# Altium PCB CLARA Mainboard.PcbDoc
Units mm, origin at the board's own origin, x right, y up, seen from the top; angles counter-clockwise.
Board outline 44.16 x 42.91 mm, 2 copper layers (Top Layer, Bottom Layer); 16 components, 5 nets, 98 pads, 16 vias.
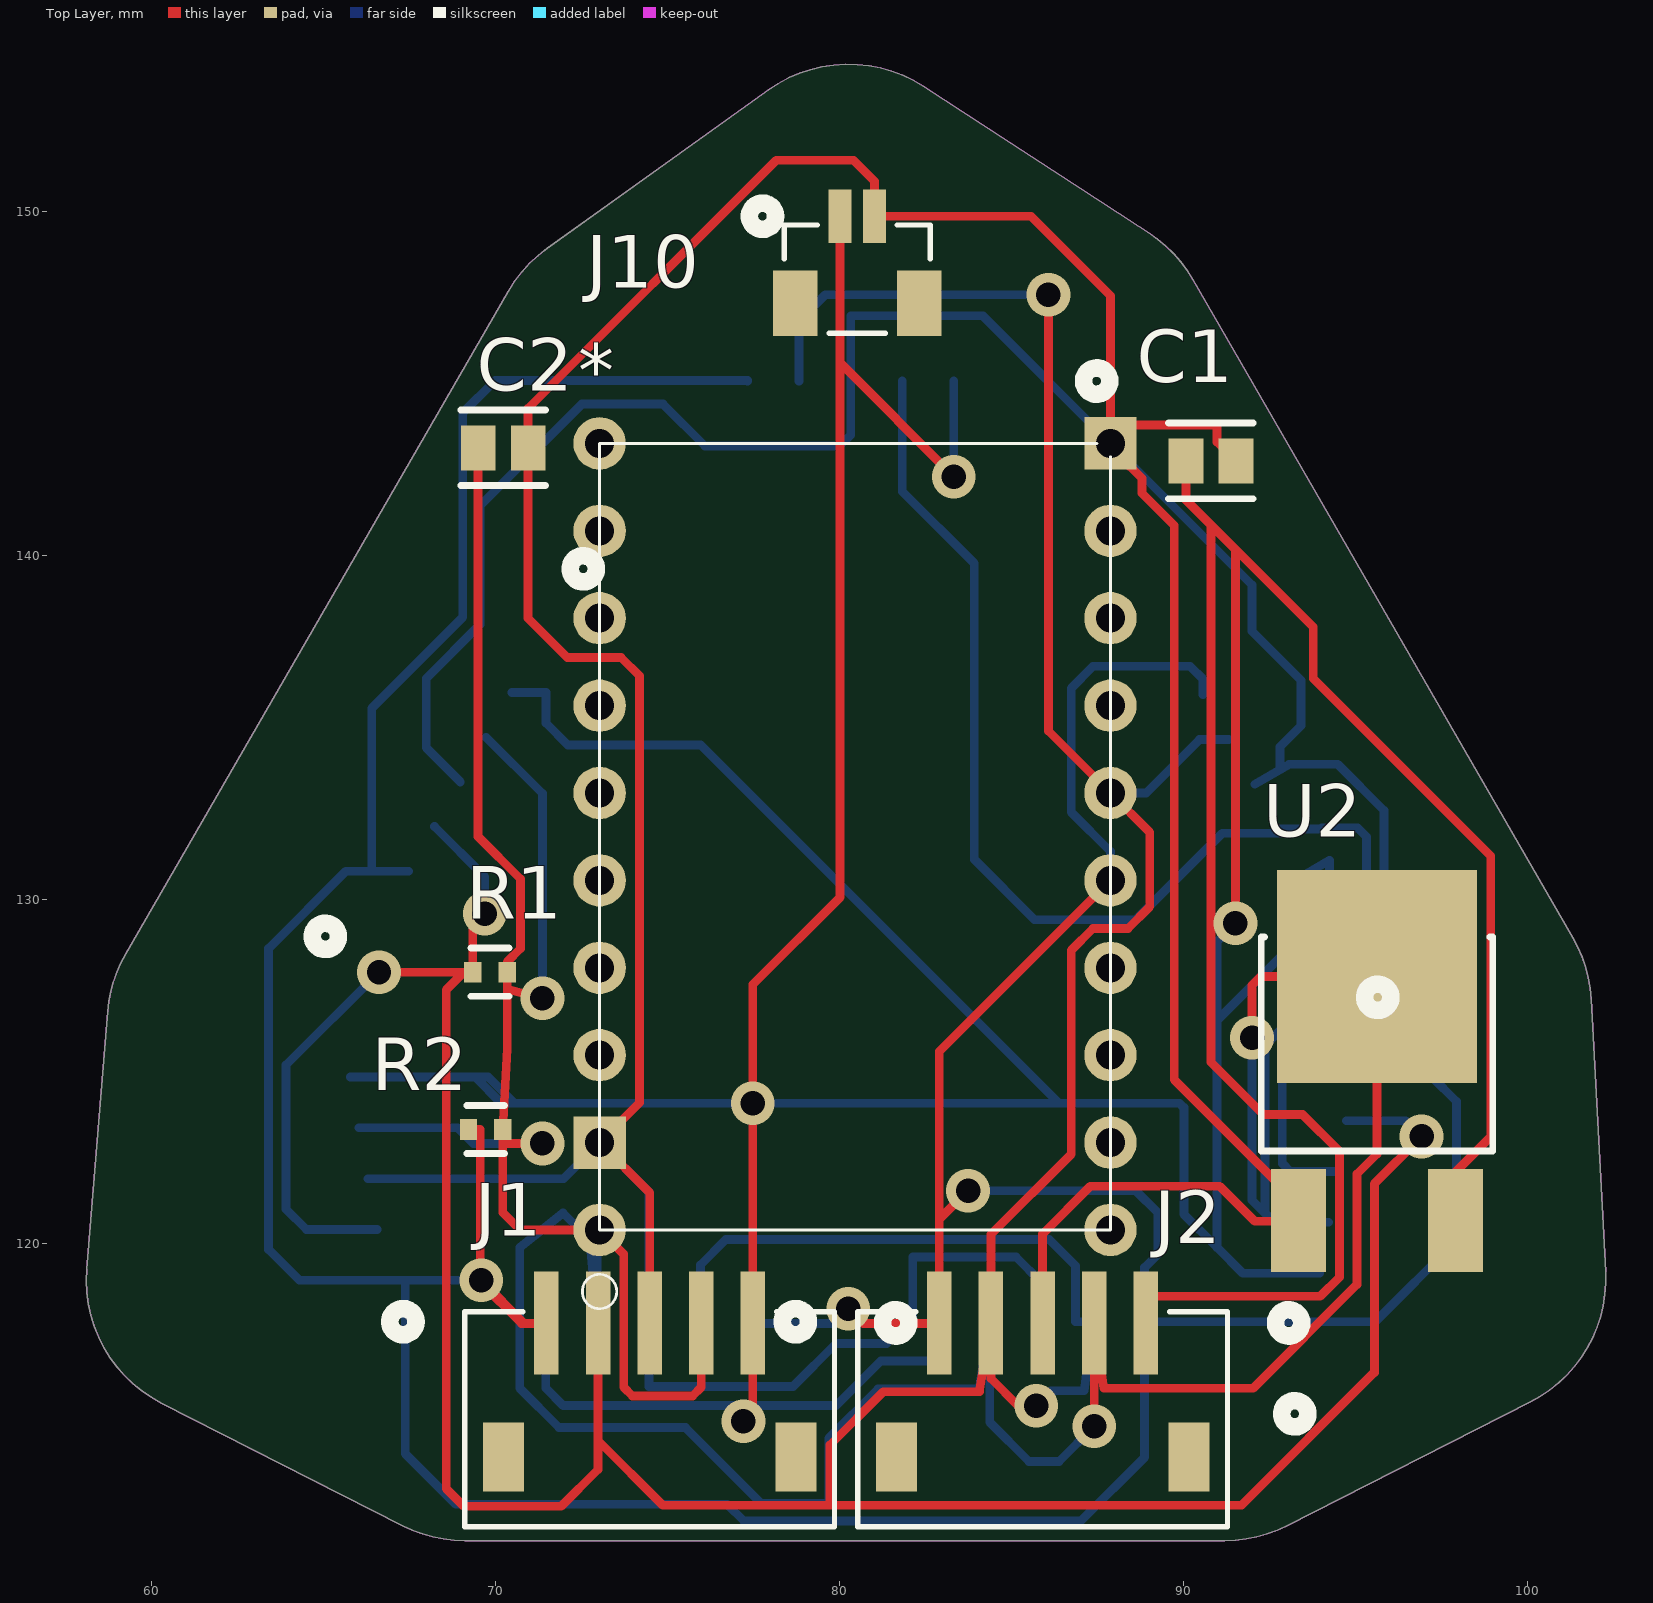
[diagram p0: Top Layer view]
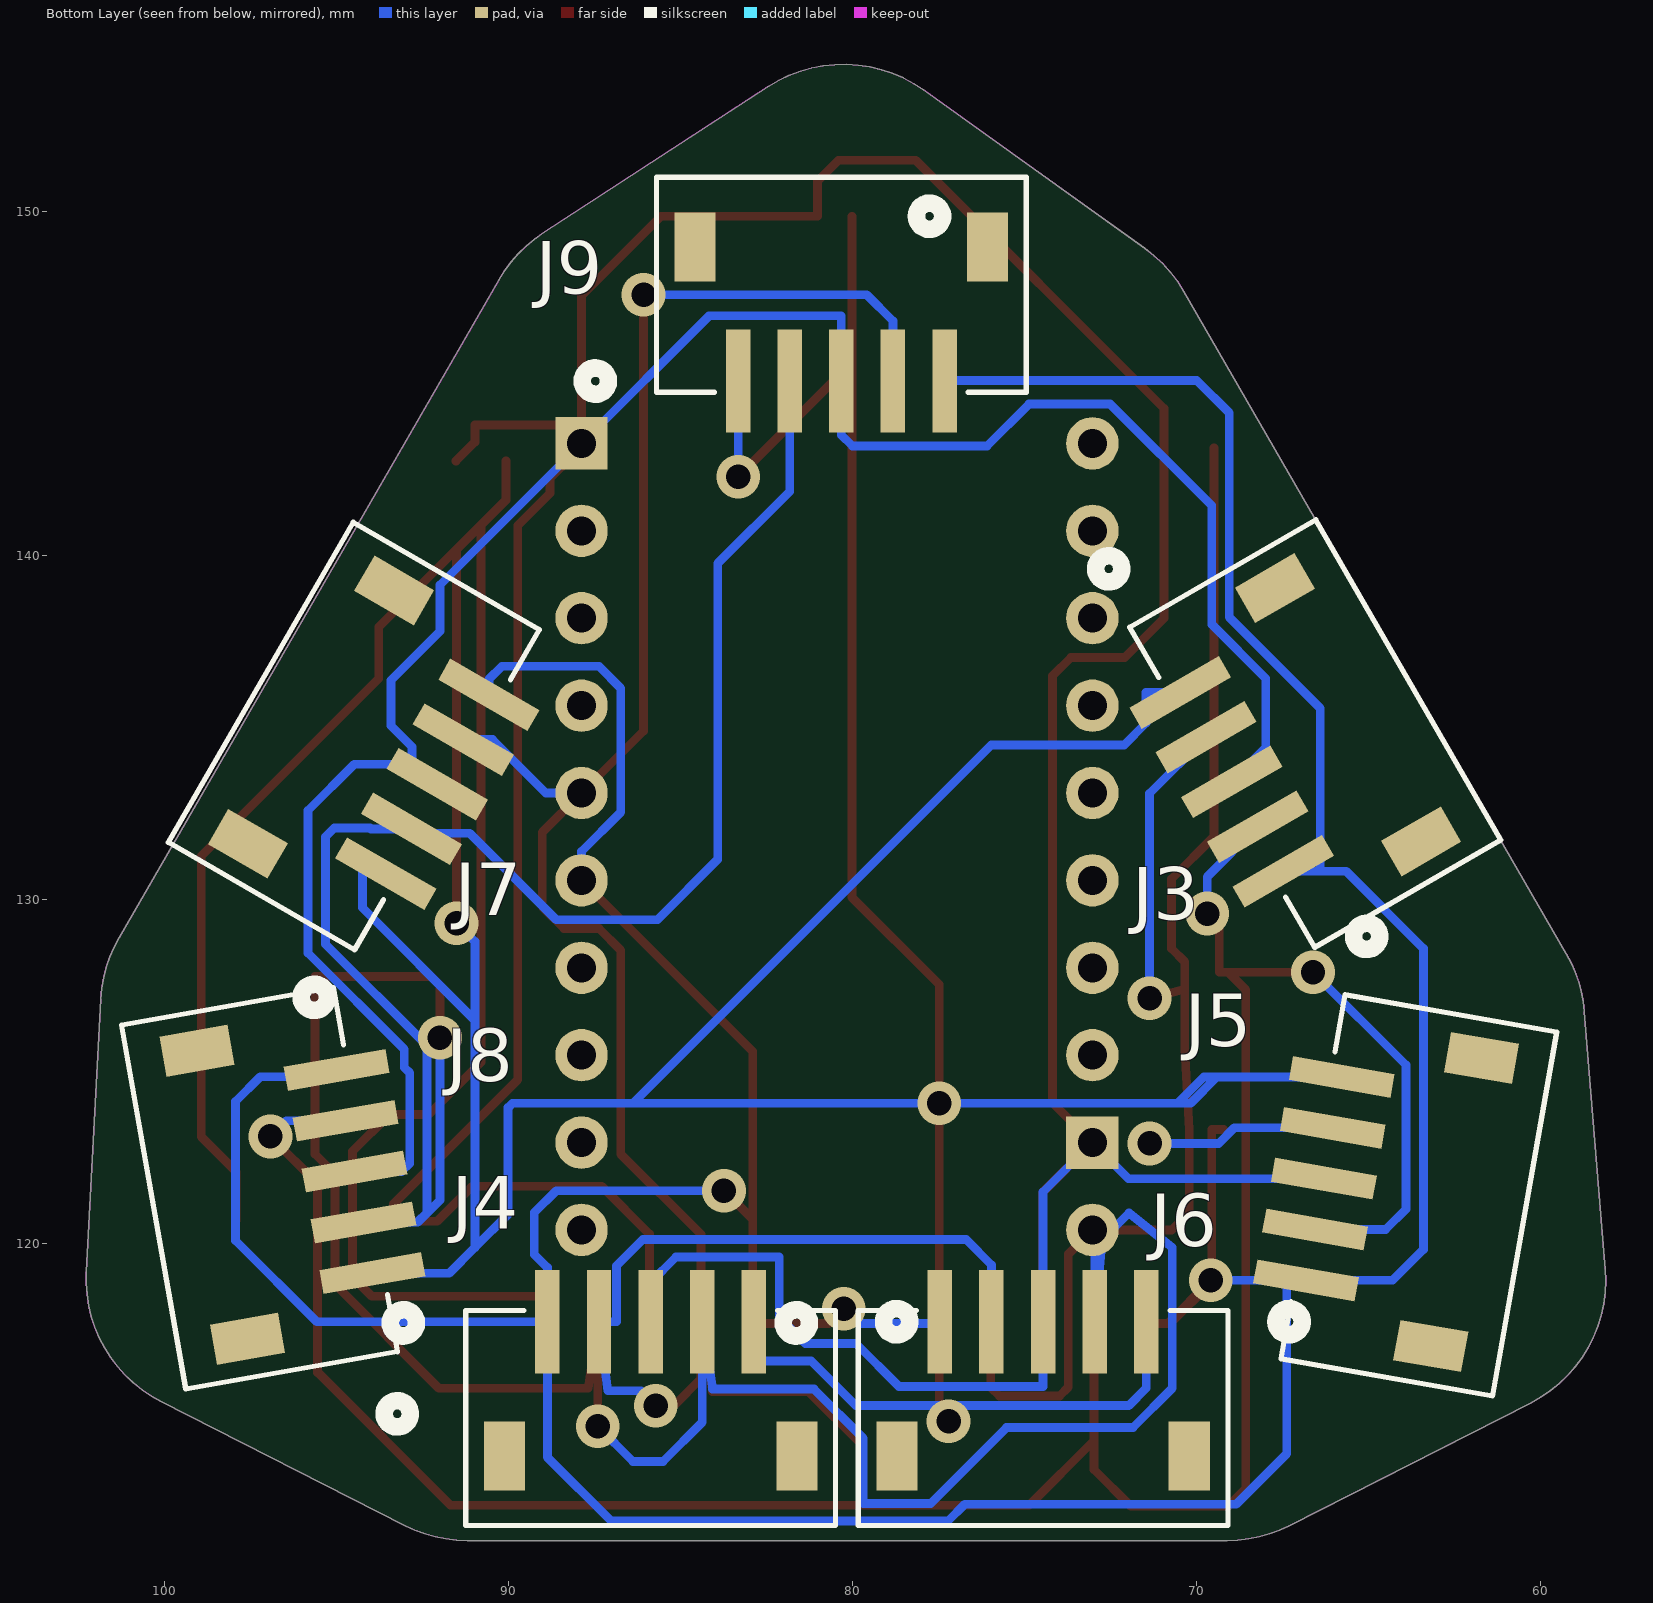
[diagram p1: Bottom Layer view, seen from below]
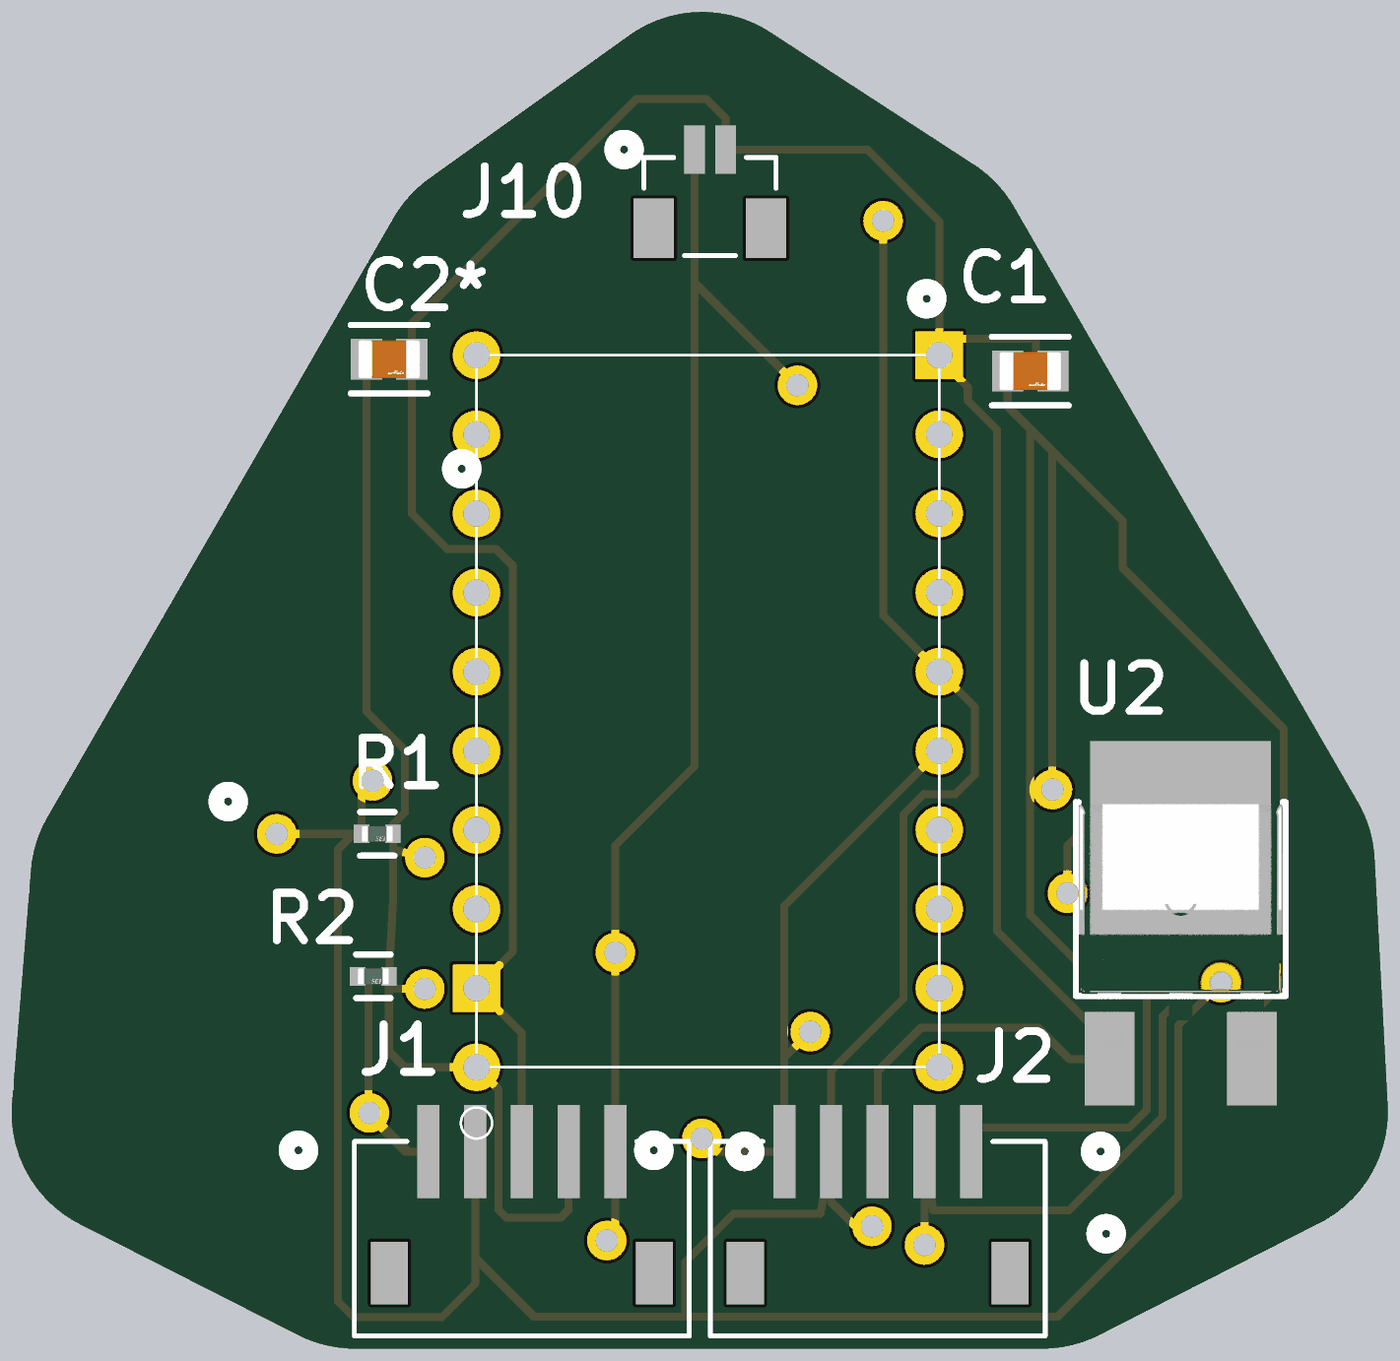
[diagram p2: 3D render of the assembled board from above, using the file's embedded part models]

## Layer stack, top to bottom
Top Solder: solder mask 0.0102, Solder Resist, Dk 3.5
Top Layer: signal copper 0.0356
Dielectric 1: dielectric 0.32, FR-4, Dk 4.8
Bottom Layer: signal copper 0.0356
Bottom Solder: solder mask 0.0102, Solder Resist, Dk 3.5

## Board outline
60.303,115.364 67.307,111.801 ccw(c69.121,115.366) 69.121,111.366 91.203,111.366 ccw(c91.203,115.366) 93.017,111.801 100.093,115.401 ccw(c98.28,118.966) 102.274,119.178 101.853,127.107 ccw(c97.859,126.895) 101.323,128.895 90.282,148.019 ccw(c86.818,146.019) 88.999,149.372 82.451,153.63 ccw(c80.27,150.277) 77.942,153.529 71.515,148.927 ccw(c73.844,145.675) 70.379,147.675 59.262,128.418 ccw(c62.726,126.418) 58.739,126.742 58.13,119.254 ccw(c62.116,118.93)

## Design rules (kind name [scope] priority, off if disabled: settings)
Clearance [All] p1: gap=0.254 ignorepadtopadclearanceinfootprint=FALSE except(0: Arc-Hole Track-Hole SMDPad-Hole THPad-Hole Via-Hole Fill-Hole Poly-Hole Region-Hole Text-Hole)
HoleSize [All] p1: absolutevalues=TRUE maxlimit=2.54 minlimit=0.3 maxpercent=80.000 minpercent=20.000
PolygonConnect [All] p1: connectstyle=Relief reliefconductorwidth=0.254 reliefentries=4 polygonreliefangle="90 Angle" airgapwidth=0.254
RoutingVias [All] p1: holewidth=0.711 width=1.27 viastyle="Through Hole" minholewidth=0.3 minwidth=1.27 maxholewidth=0.711 maxwidth=1.27
SolderMaskExpansion [All] p1: expansion=0.102 istentingtop=FALSE
Width [All] p1: maxlimit=0.254 minlimit=0.254 preferedwidth=0.254
29 further rules are at their usual default settings.

## Components (designator, comment, footprint, x,y, rotation, side; value= is the part's Value field where it differs from the comment)
* "TinyPICO" "TinyPICO Board" 65.414,117.856 r90 top
C1 "GRM21BR61E106KA73L - 10 uF" FP-GRM21B-0_15-IPC_C 90.805,142.748 r0 top
C2 "GRM21BR61E106KA73L - 10 uF" FP-GRM21B-0_15-IPC_C 70.231,143.129 r0 top
J1 "S5B-ZR-SM4A-TF (LF) (SN)" CONN_S5B-ZR-SM4A-TF_JST 77.49,117.694 r180 top
J2 "S5B-ZR-SM4A-TF (LF) (SN)" CONN_S5B-ZR-SM4A-TF_JST 88.911,117.694 r180 top
J3 "S5B-ZR-SM4A-TF (LF) (SN)" CONN_S5B-ZR-SM4A-TF_JST 70.485,136.017 r240 bottom
J4 "S5B-ZR-SM4A-TF (LF) (SN)" CONN_S5B-ZR-SM4A-TF_JST 82.876,117.729 r0 bottom
J5 "S5B-ZR-SM4A-TF (LF) (SN)" CONN_S5B-ZR-SM4A-TF_JST 65.786,124.841 r280 bottom
J6 "S5B-ZR-SM4A-TF (LF) (SN)" CONN_S5B-ZR-SM4A-TF_JST 71.47,117.729 r0 bottom
J7 "S5B-ZR-SM4A-TF (LF) (SN)" CONN_S5B-ZR-SM4A-TF_JST 93.575,130.752 r120 bottom
J8 "S5B-ZR-SM4A-TF (LF) (SN)" CONN_S5B-ZR-SM4A-TF_JST 93.961,119.139 r80 bottom
J9 "S5B-ZR-SM4A-TF (LF) (SN)" CONN_S5B-ZR-SM4A-TF_JST 83.332,145.069 r180 bottom
J10 "BM02B-SRSS-TB (LF)(SN)" CONN_BM02B-SRSS-TB_JST 80.526,148.03 r0 top
R1 "RMCF0402JT4K70 - 4.7 kOhm" FP-RMCF0402-MFG 69.85,127.889 r0 top
R2 "RMCF0402JT4K70 - 4.7 kOhm" FP-RMCF0402-MFG 69.723,123.317 r0 top
U2 "NCP1117DT33T5G" FP-369C-MFG 95.631,124.972 r0 top

## Footprints (in the part's own frame and the unit in brackets; to place one, negate y for a bottom-side part, rotate by r counter-clockwise, add the part's x,y. Pads: shape width x height; smd on the part's side, far side on the other; paste and mask are expansions set on the pad)
CONN_BM02B-SRSS-TB_JST [mil]
  rect 26x61 smd paste+0 mask+0: 1(-19.68,72.04) 2(19.69,72.04)
  rect 51x75 smd: 3(-70.87,-27.37) 4(70.87,-27.37)
  silkscreen extent -123,-62 84,87, body extent 0,0 10,10, height 10
CONN_S5B-ZR-SM4A-TF_JST [mil]
  rect 28x118 smd paste+0 mask+0: 1(0,0) 2(59.05,0) 3(118.11,0) 4(177.17,0) 5(236.22,0)
  rect 47x79 smd: 6(-49.21,153.62) 7(285.43,153.62)
  silkscreen extent -178,-15 330,233, body extent 0,0 10,10, height 10
FP-369C-MFG [mm]
  rect 1.6x3 smd paste+0 mask+0: 1(-2.285,-4.3) 3(2.285,-4.3)
  rect 5.8x6.2 smd paste+0 mask+0: 4(0,2.79)
  silkscreen extent -3.36,-2.29 3.36,3.93, body extent -3.46,-5.9 3.46,5.99, height 0.25
FP-GRM21B-0_15-IPC_C [mm]
  rect 1.006x1.308 smd paste+0 mask+0: 1(-0.726,0) 2(0.726,0)
  silkscreen extent -1.23,-1.1 1.23,1.1, body extent -1.33,-0.8 1.33,0.8, height 0.25
FP-RMCF0402-MFG [mm]
  rect 0.5x0.6 smd paste+0 mask+0: 1(-0.5,0) 2(0.5,0)
  silkscreen extent -0.55,-0.7 0.55,0.7, body extent -0.85,-0.4 0.85,0.4, height 0.25
"TinyPICO Board" [mil]
  round 60 hole 33.23: 3V3(400,-300) 4(500,-300) 5(400,-884.65) 5V(300,-300) 14(600,-300) 15(700,-300) 18(300,-884.65) 19(200,-884.65) 21(600,-884.65) 22(500,-884.65) 25(1000,-300) 26(900,-300) 27(800,-300) 32(700,-884.65) 33(800,-884.65) RST(900,-884.65)
  round 60 hole 33.24: 23(100,-884.65) BAT(100,-300)
  rect 60x60 hole 33.23: G(200,-300) G(1000,-884.65)
  Top Layer lines w10: 1000,-869.29 992.32,-876.97 984.65,-884.65
  silkscreen extent 10,-885 1000,-280

## Part data
C1 C2: library part CMP-2007-03541-2, "Chip Multilayer Ceramic Capacitors for General Purpose, 0805, 10uF, X5R, 15%, 10%, 25V", Capacitance=10uF, Case Code (Imperial)=0805, Case Code (Metric)=2012, Dielectric=X5R, Max Operating Temperature=85°C, Min Operating Temperature=-55°C, Package Quantity=1, Tolerance=10%, Voltage=25V, Case/Package=0805, Depth=1.25mm, Height=1.25mm, Lead Free="Lead Free", Length=2mm, Material=Ceramic, Mount="Surface Mount", Packaging="Tape and Reel", Radiation Hardening=No, Termination=SMD/SMT, Thickness=0.053inch, Voltage Rating=25V, Voltage Rating (DC)=25V, Width=0.049inch
J1 J2 J3 J4 J5 J6 J7 J8 J9 J10: "No Description Available", Mfr_Name=JST, Copyright="Copyright (C) 2021 Ultra Librarian. All rights reserved.", RefDes=RefDes, Type=DEV
  J1 J2 J3 J4 J5 J6 J7 J8 J9: Manufacturer_Part_Number="S5B-ZR-SM4A-TF (LF) (SN)"
  J10: Manufacturer_Part_Number="BM02B-SRSS-TB (LF)(SN)"
R1 R2: library part CMP-2000-06988-2, "4.7kΩ ±5% 0.063W 0402 Thick Film Chip Resistor AEC-Q200 compliant", Case Code (Imperial)=0402, Case Code (Metric)=1005, Max Operating Temperature=155°C, Max Power Dissipation=63mW, Min Operating Temperature=-55°C, Resistance=4.7kR, Resistor Type="Thick Film", Temperature Coefficient=100ppm/°C, Tolerance=5%, Case/Package=0402, Construction=Rectangular, Contact Plating=Tin, Depth=0.5mm, Features="Automotive AEC-Q200", Height=0.016inch, Lead Free="Lead Free", Length=0.039inch, Military Standard=Not, Mount="Surface Mount", Number of Terminations=2, Packaging="Tape and Reel", Power Rating=63mW, Radiation Hardening=No, RoHS Compliant=Yes, Series=RMCF, Width=0.02inch
U2: library part CMP-07128-000023-2, "IC REG LINEAR 3.3V 1A DPAK", Case/Package=DPAK, Dropout Voltage=1.07V, Input Bias Current=6mA, Max Input Voltage=20V, Max Operating Temperature=125°C, Max Output Current=1A, Min Operating Temperature=0°C, Nominal Output Voltage=3.3V, Output Voltage Accuracy=1%, Package Quantity=1, Quiescent Current=10mA, Reference Voltage=1.27V, Accuracy=1%, Contact Plating=Tin, Halogen Free="Halogen Free", Height=2.38mm, Lead Free="Lead Free", Length=6.73mm, Min Current Limit=1A, Mount="Surface Mount", Number of Outputs=1, Number of Pins=3, Number of Regulators=1, Output Current=1A, Output Type=Fixed, Output Voltage=3.3V, Packaging="Tape and Reel", Polarity=Positive, Radiation Hardening=No, REACH SVHC="No SVHC", Width=6.22mm

## Via types
v1: diameter 1.27, hole 0.711, Top Layer to Bottom Layer, 16 vias

## Nets (pads, with @x,y where several pads share a name; then routed paths per layer and width w, separated by ;. In a path a pad name is that pad's centre, name@x,y a point inside that pad or via, vN(x,y) a via of type N, cw(c..) or ccw(c..) an arc to the next point about the centre after c; other vN are vias at no path point)
GND: *.G C1.2 C2.2 J1.3 J2.3 J3.3 J4.3 J5.3 J6.3 J7.3 J8.3 J9.3 J10.2 U2.1 | length 191.8
  Top Layer w0.254: J1.3 74.49,121.48 73.034,122.936 74.193,124.095 74.193,136.5 73.66,137.033 72.1,137.033 70.957,138.176 C2.2 70.957,144.272 78.171,151.486 80.416,151.486 81.026,150.876 J10.2 85.573,149.86 87.884,147.549 *.G@87.884,143.789 ; J2.3 85.911,120.277 87.3,121.666 91.059,121.666 92.075,120.65 93.346,120.65 U2.1 93.346,121.158 89.738,124.766 89.738,140.868 88.798,141.808 88.798,142.24 88.172,142.866 87.884,142.866 87.884,143.256 *.G@87.884,143.789 ; *.G@87.494,143.256 87.494,143.51 87.773,143.789 *.G@87.884,143.789 ; C1.2 90.983,143.296 90.983,143.789 *.G@87.884,143.789
  Bottom Layer w0.254: J5.3 71.985,121.887 73.034,122.936 74.47,121.5 J6.3 74.47,115.849 78.664,115.849 79.908,117.094 81.377,117.094 82.139,117.856 82.139,119.609 85.139,119.609 85.876,118.872 J4.3 ; J3.3 67.996,134.408 67.996,136.423 69.569,137.996 69.569,141.451 72.517,144.399 74.879,144.399 76.098,143.18 80.01,143.18 80.332,143.502 J9.3 80.332,146.964 84.176,146.964 87.884,143.256 91.999,139.141 91.999,137.795 93.421,136.373 93.421,135.052 92.811,134.442 J7.3@92.811,133.775 ; J7.3 J7.3@92.811,133.775 ; J8.3 93.116,122.094 92.88,122.33 92.88,124.961 93.036,125.117 93.036,125.649 95.834,128.448 95.834,132.588 94.488,133.934 93.065,133.934 93.065,133.921 J7.3@92.811,133.775
SCL: *.22 J1.5 J2.5 J3.5 J4.5 J5.5 J6.5 J7.5 J8.5 J9.5 R2.1 | length 143.6
  Top Layer w0.254: R2.1 69.571,123.317 69.571,118.872 70.764,117.678 70.85,117.678 ; v1(69.596,118.932) 70.85,117.678 ; J1.5 71.49,117.678 70.85,117.678 ; v1(80.264,118.11) 80.696,117.678 82.911,117.678 J2.5 82.911,120.706 ; v1(83.744,121.539) 82.911,120.706 ; *.22 82.911,125.583 82.911,120.706
  Bottom Layer w0.254: J3.5 66.41,130.821 ; v1(69.596,118.932) J5.5@67.386,118.932 ; J9.5 77.332,145.085 70.002,145.085 69.061,144.143 69.061,138.207 66.41,135.556 66.41,130.821 ; J6.5 77.47,117.678 79.756,117.678 80.188,118.11 v1(80.264,118.11) ; v1(83.744,121.539) 88.621,121.539 89.256,120.904 89.256,119.683 88.876,119.304 J4.5 ; *.22 87.884,131.394 86.741,132.537 86.741,136.144 87.376,136.779 90.195,136.779 90.576,136.398 90.576,135.948 J7.5 ; J8.5 96.128,124.85 97.222,124.85 97.942,124.13 97.942,120.091 95.58,117.729 J4.5 ; 66.41,130.821 65.659,130.821 63.416,128.578 63.416,119.829 64.313,118.932 J5.5 J5.5@67.386,118.932 ; J5.5@67.386,118.932 67.386,113.894 68.859,112.42 76.748,112.42 77.234,111.935 87.019,111.935 88.876,113.792 J4.5
SDA: *.21 J1.4 J2.4 J3.4 J4.4 J5.4 J6.4 J7.4 J8.4 J9.4 R1.1 | length 155.8
  Top Layer w0.254: v1(66.624,127.889) 69.088,127.889 ; v1(69.698,129.591) 69.35,129.243 R1.1 69.088,127.889 ; J1.4 72.99,114.275 ; v1(85.725,115.291) 85.198,115.291 84.411,116.078 J2.4 ; v1(86.081,147.574) 86.081,134.899 *.21 89.027,131.953 89.027,129.794 88.392,129.159 87.376,129.159 86.741,128.524 86.741,122.599 84.411,120.269 J2.4 ; v1(96.926,123.114) 95.555,121.742 95.555,116.256 91.694,112.395 79.731,112.395 ; 69.088,127.889 68.58,127.381 68.58,112.878 69.088,112.37 71.923,112.37 72.99,113.436 72.99,114.275 ; 72.99,114.275 74.87,112.395 79.731,112.395 ; 79.731,112.395 79.731,114.148 81.28,115.697 84.074,115.697 J2.4
  Bottom Layer w0.254: J5.4 64.516,120.409 63.924,121.002 63.924,125.189 v1(66.624,127.889) ; J3.4 69.698,130.657 v1(69.698,129.591) ; J6.4 75.97,119.38 76.707,120.117 86.106,120.117 86.868,119.355 86.868,117.729 J4.4 87.122,115.722 86.157,115.722 v1(85.725,115.291) ; J9.4 78.832,146.812 79.594,147.574 v1(86.081,147.574) ; *.21 88.922,133.096 90.475,134.649 J7.4 ; J8.4 96.469,123.571 v1(96.926,123.114)
VBAT: C1.1 J1.1 J2.1 J3.1 J4.1 J5.1 J6.1 J7.1 J8.1 J9.1 J10.1 U2.3 | length 200.9
  Top Layer w0.254: v1(77.216,114.833) 77.49,115.107 J1.1 v1(77.49,124.079) 77.49,127.528 80.026,130.064 80.026,145.597 ; J10.1 80.026,145.597 ; v1(83.332,142.291) 80.026,145.597 ; J2.1 88.911,118.466 93.98,118.466 94.539,119.024 94.539,122.682 93.472,123.749 92.329,123.749 90.805,125.273 90.805,140.879 ; C1.1 90.079,141.62 ; v1(91.516,129.311) 91.516,140.168 90.805,140.879 ; U2.3 97.916,122.088 98.933,123.105 98.933,131.267 93.777,136.423 93.777,137.922 90.805,140.894 ; 90.079,141.62 90.079,141.605 90.805,140.879 ; 90.079,141.62 90.805,140.894 ; 90.805,140.879 90.805,140.894
  Bottom Layer w0.254: J5.1 69.418,124.841 ; J3.1 71.476,136.017 71.476,135.128 72.111,134.493 75.971,134.493 86.385,124.079 ; J6.1 71.47,115.804 71.984,115.291 76.759,115.291 ; v1(77.216,114.833) 76.759,115.291 ; J4.1 82.876,116.586 81.204,116.586 79.908,115.291 76.759,115.291 ; v1(83.332,142.291) J9.1 ; v1(91.516,129.311) 90.983,128.778 90.983,126.492 ; J7.1 94.248,131.14 94.248,129.757 90.983,126.492 ; J8.1 91.731,119.139 90.983,119.888 ; 69.418,124.841 69.799,124.841 70.561,124.079 ; 69.418,124.841 70.18,124.079 70.561,124.079 ; 70.561,124.079 v1(77.49,124.079) 86.385,124.079 ; 86.385,124.079 89.891,124.079 90.018,123.952 90.018,120.853 90.983,119.888 ; 90.983,119.888 90.983,126.492
VCC: *.BAT C2.1 J1.2 J2.2 J3.2 J4.2 J5.2 J6.2 J7.2 J8.2 J9.2 R1.2 R2.2 U2.4 | length 165.2
  Top Layer w0.254: C2.1 69.505,131.826 70.736,130.595 70.736,128.575 70.35,128.189 R1.2 70.35,127.389 ; v1(71.374,122.911) 70.223,122.911 ; v1(71.374,127.127) 70.35,127.389 ; J1.2 75.99,115.824 75.736,115.57 73.99,115.57 73.736,115.824 73.736,119.694 *.BAT 70.731,120.396 70.223,120.904 70.223,122.911 ; v1(87.411,114.691) J2.2 87.69,115.799 92.031,115.799 95.047,118.814 95.047,122.022 95.631,122.606 U2.4 92.253,127.762 91.999,127.508 v1(91.999,125.984) ; 70.223,122.911 R2.2 70.35,125.654 70.35,127.389
  Bottom Layer w0.254: J5.2 68.91,123.364 69.363,122.911 v1(71.374,122.911) ; J3.2 71.374,133.079 v1(71.374,127.127) ; *.BAT *.BAT@72.748,120.11 ; J9.2 81.832,141.859 83.922,139.769 83.922,131.166 85.674,129.413 88.621,129.413 91.135,131.928 92.837,131.928 J7.2@92.837,132.051 ; v1(87.411,114.691) 86.388,113.668 85.516,113.668 84.376,114.808 J4.2 84.074,115.77 81.125,115.77 79.698,114.343 79.698,112.443 77.742,112.443 75.529,114.656 71.857,114.656 70.714,115.799 70.714,119.888 71.971,120.887 *.BAT@72.748,120.11 ; v1(91.999,125.984) 91.999,121.26 92.642,120.617 92.659,120.617 ; J7.2 J7.2@92.837,132.051 ; J8.2 92.659,120.617 ; *.BAT@72.748,120.11 72.97,119.888 J6.2 *.BAT@72.748,120.11 ; 92.659,120.617 92.372,120.904 92.372,125.747 95.326,128.702 95.326,131.826 95.072,132.08 94.034,132.08 94.005,132.051 J7.2@92.837,132.051
pads on no net: *.3V3 *.4 *.5 *.5V *.14 *.15 *.18 *.19 *.23 *.25 *.26 *.27 *.32 *.33 *.RST J1.6 J1.7 J2.6 J2.7 J3.6 J3.7 J4.6 J4.7 J5.6 J5.7 J6.6 J6.7 J7.6 J7.7 J8.6 J8.7 J9.6 J9.7 J10.3 J10.4

## Keep-outs
Keep-Out Layer:
  the board outline again, w0.013

## Silkscreen, mask and mechanical layers (free items; w line width, h text height)
Mechanical 1:
  lines w0.013: 67.064,113.731 ccw(c67.497,113.981) 67.93,114.231 ; 92.417,114.268 ccw(c92.85,114.018) 93.283,113.768

## Text inside footprints (layer, text, board x,y; h text height)
J1: Mechanical 7 "0.236in/5.994mm" at 94.158,115.21 h0.64 r180; Mechanical 7 "0.228in/5.799mm" at 95.428,115.112 h0.64 r180; Mechanical 7 "0.154in/3.902mm" at 87.173,116.06 h0.64 r180; Mechanical 7 "0in/0mm" at 66.197,118.011 h0.64 r180; Mechanical 7 "0.413in/10.49mm" at 76.871,100.973 h0.64 r180; Mechanical 7 "0.335in/8.5mm" at 76.554,103.513 h0.64 r180; Mechanical 7 "0.059in/1.5mm" at 78.804,109.228 h0.64 r180; Mechanical 7 "Alt Padstyle 2: OX90Y60D30P" at 83.063,136.592 h1.27 r180; Mechanical 7 "Alt Padstyle 1: OX60Y90D30P" at 83.063,134.687 h1.27 r180; Mechanical 7 "Right Mtg Padstyle: EX60Y60D30P" at 84.333,132.782 h1.27 r180; Mechanical 7 "Left Mtg Padstyle: EX60Y60D30P" at 84.015,130.877 h1.27 r180; Mechanical 7 "3rd Mtg Padstyle: EX70Y70D70P" at 83.698,128.972 h1.27 r180; Mechanical 7 "2nd Mtg Padstyle: EX70Y70D70P" at 83.698,127.067 h1.27 r180; Mechanical 7 "1st Mtg Padstyle: RX79Y47D0T" at 83.38,125.162 h1.27 r180; Mechanical 7 "Default Padstyle: RX28Y118D0T" at 83.698,123.257 h1.27 r180
J2: Mechanical 7 "0.236in/5.994mm" at 105.579,115.21 h0.64 r180; Mechanical 7 "0.228in/5.799mm" at 106.849,115.112 h0.64 r180; Mechanical 7 "0.154in/3.902mm" at 98.594,116.06 h0.64 r180; Mechanical 7 "0in/0mm" at 77.618,118.012 h0.64 r180; Mechanical 7 "0.413in/10.49mm" at 88.292,100.973 h0.64 r180; Mechanical 7 "0.335in/8.5mm" at 87.975,103.513 h0.64 r180; Mechanical 7 "0.059in/1.5mm" at 90.225,109.228 h0.64 r180; Mechanical 7 "Alt Padstyle 2: OX90Y60D30P" at 94.483,136.592 h1.27 r180; Mechanical 7 "Alt Padstyle 1: OX60Y90D30P" at 94.483,134.687 h1.27 r180; Mechanical 7 "3rd Mtg Padstyle: EX70Y70D70P" at 95.118,128.972 h1.27 r180; Mechanical 7 "2nd Mtg Padstyle: EX70Y70D70P" at 95.118,127.067 h1.27 r180; Mechanical 7 "1st Mtg Padstyle: RX79Y47D0T" at 94.801,125.162 h1.27 r180; Mechanical 7 "Default Padstyle: RX28Y118D0T" at 95.118,123.257 h1.27 r180
J3: Mechanical 7 "0.236in/5.994mm" at 76.667,151.694 h0.64 r60; Mechanical 7 "0.228in/5.799mm" at 77.218,152.843 h0.64 r60; Mechanical 7 "0.154in/3.902mm" at 73.912,145.219 h0.64 r60; Mechanical 7 "0in/0mm" at 65.113,126.078 h0.64 r60; Mechanical 7 "0.413in/10.49mm" at 55.695,143.842 h0.64 r60; Mechanical 7 "0.335in/8.5mm" at 57.736,142.297 h0.64 r60; Mechanical 7 "0.059in/1.5mm" at 63.81,141.388 h0.64 r60; Mechanical 7 "Alt Padstyle 2: OX90Y60D30P" at 89.637,131.394 h1.27 r60; Mechanical 7 "Alt Padstyle 1: OX60Y90D30P" at 87.987,132.347 h1.27 r60; Mechanical 7 "Right Mtg Padstyle: EX60Y60D30P" at 86.972,134.399 h1.27 r60; Mechanical 7 "Left Mtg Padstyle: EX60Y60D30P" at 85.164,135.077 h1.27 r60; Mechanical 7 "3rd Mtg Padstyle: EX70Y70D70P" at 83.355,135.754 h1.27 r60; Mechanical 7 "2nd Mtg Padstyle: EX70Y70D70P" at 81.706,136.707 h1.27 r60; Mechanical 7 "Default Padstyle: RX28Y118D0T" at 78.406,138.612 h1.27 r60
J4: Mechanical 7 "0.236in/5.994mm" at 66.208,115.245 h0.64 r180; Mechanical 7 "0.228in/5.799mm" at 64.938,115.147 h0.64 r180; Mechanical 7 "0.154in/3.902mm" at 73.193,116.096 h0.64 r180; Mechanical 7 "0in/0mm" at 94.169,118.047 h0.64 r180; Mechanical 7 "0.413in/10.49mm" at 83.495,101.008 h0.64 r180; Mechanical 7 "0.335in/8.5mm" at 83.812,103.548 h0.64 r180; Mechanical 7 "0.059in/1.5mm" at 81.562,109.263 h0.64 r180; Mechanical 7 "Alt Padstyle 2: OX90Y60D30P" at 77.304,136.627 h1.27 r180; Mechanical 7 "Alt Padstyle 1: OX60Y90D30P" at 77.304,134.722 h1.27 r180; Mechanical 7 "Right Mtg Padstyle: EX60Y60D30P" at 76.034,132.817 h1.27 r180; Mechanical 7 "Left Mtg Padstyle: EX60Y60D30P" at 76.351,130.912 h1.27 r180; Mechanical 7 "2nd Mtg Padstyle: EX70Y70D70P" at 76.669,127.102 h1.27 r180; Mechanical 7 "Default Padstyle: RX28Y118D0T" at 76.669,123.292 h1.27 r180
J5: Mechanical 7 "0.236in/5.994mm" at 60.445,140.824 h0.64 r100; Mechanical 7 "0.228in/5.799mm" at 60.128,142.058 h0.64 r100; Mechanical 7 "0.154in/3.902mm" at 62.496,134.093 h0.64 r100; Mechanical 7 "0in/0mm" at 68.06,113.775 h0.64 r100; Mechanical 7 "0.413in/10.49mm" at 49.426,121.328 h0.64 r100; Mechanical 7 "0.335in/8.5mm" at 51.983,121.456 h0.64 r100; Mechanical 7 "0.059in/1.5mm" at 57.22,124.665 h0.64 r100; Mechanical 7 "Alt Padstyle 2: OX90Y60D30P" at 83.429,133.61 h1.27 r100; Mechanical 7 "Alt Padstyle 1: OX60Y90D30P" at 81.553,133.28 h1.27 r100; Mechanical 7 "Right Mtg Padstyle: EX60Y60D30P" at 79.456,134.199 h1.27 r100; Mechanical 7 "Left Mtg Padstyle: EX60Y60D30P" at 77.635,133.556 h1.27 r100; Mechanical 7 "3rd Mtg Padstyle: EX70Y70D70P" at 75.814,132.913 h1.27 r100; Mechanical 7 "2nd Mtg Padstyle: EX70Y70D70P" at 73.938,132.582 h1.27 r100
J6: Mechanical 7 "0.236in/5.994mm" at 54.802,115.245 h0.64 r180; Mechanical 7 "0.228in/5.799mm" at 53.532,115.147 h0.64 r180; Mechanical 7 "0.154in/3.902mm" at 61.787,116.096 h0.64 r180; Mechanical 7 "0in/0mm" at 82.763,118.047 h0.64 r180; Mechanical 7 "0.413in/10.49mm" at 72.089,101.008 h0.64 r180; Mechanical 7 "0.335in/8.5mm" at 72.406,103.548 h0.64 r180; Mechanical 7 "0.059in/1.5mm" at 70.156,109.263 h0.64 r180; Mechanical 7 "Alt Padstyle 2: OX90Y60D30P" at 65.897,136.627 h1.27 r180; Mechanical 7 "Alt Padstyle 1: OX60Y90D30P" at 65.897,134.722 h1.27 r180; Mechanical 7 "Left Mtg Padstyle: EX60Y60D30P" at 64.945,130.912 h1.27 r180; Mechanical 7 "3rd Mtg Padstyle: EX70Y70D70P" at 65.262,129.007 h1.27 r180; Mechanical 7 "2nd Mtg Padstyle: EX70Y70D70P" at 65.262,127.102 h1.27 r180; Mechanical 7 "1st Mtg Padstyle: RX79Y47D0T" at 65.58,125.197 h1.27 r180; Mechanical 7 "Default Padstyle: RX28Y118D0T" at 65.262,123.292 h1.27 r180
J7: Mechanical 7 "0.236in/5.994mm" at 104.06,117.559 h0.64 r300; Mechanical 7 "0.228in/5.799mm" at 104.78,116.508 h0.64 r300; Mechanical 7 "0.154in/3.902mm" at 99.831,123.183 h0.64 r300; Mechanical 7 "0in/0mm" at 87.653,140.373 h0.64 r300; Mechanical 7 "0.413in/10.49mm" at 107.746,139.648 h0.64 r300; Mechanical 7 "0.335in/8.5mm" at 105.388,138.653 h0.64 r300; Mechanical 7 "0.059in/1.5mm" at 101.564,133.847 h0.64 r300; Mechanical 7 "Alt Padstyle 1: OX60Y90D30P" at 81.645,117.43 h1.27 r300; Mechanical 7 "Right Mtg Padstyle: EX60Y60D30P" at 83.93,117.282 h1.27 r300; Mechanical 7 "3rd Mtg Padstyle: EX70Y70D70P" at 86.912,119.737 h1.27 r300; Mechanical 7 "2nd Mtg Padstyle: EX70Y70D70P" at 88.562,120.69 h1.27 r300; Mechanical 7 "1st Mtg Padstyle: RX79Y47D0T" at 90.053,121.917 h1.27 r300; Mechanical 7 "Default Padstyle: RX28Y118D0T" at 91.861,122.595 h1.27 r300
J8: Mechanical 7 "0.236in/5.994mm" at 93.513,102.293 h0.64 r260; Mechanical 7 "0.228in/5.799mm" at 93.388,101.026 h0.64 r260; Mechanical 7 "0.154in/3.902mm" at 93.888,109.32 h0.64 r260; Mechanical 7 "0in/0mm" at 95.609,130.316 h0.64 r260; Mechanical 7 "0.413in/10.49mm" at 110.535,116.845 h0.64 r260; Mechanical 7 "0.335in/8.5mm" at 108.089,117.599 h0.64 r260; Mechanical 7 "0.059in/1.5mm" at 102.07,116.375 h0.64 r260; Mechanical 7 "Alt Padstyle 2: OX90Y60D30P" at 74.382,116.933 h1.27 r260; Mechanical 7 "Alt Padstyle 1: OX60Y90D30P" at 76.258,116.602 h1.27 r260; Mechanical 7 "Right Mtg Padstyle: EX60Y60D30P" at 77.914,115.021 h1.27 r260; Mechanical 7 "Left Mtg Padstyle: EX60Y60D30P" at 79.845,115.003 h1.27 r260; Mechanical 7 "3rd Mtg Padstyle: EX70Y70D70P" at 81.776,114.985 h1.27 r260; Mechanical 7 "2nd Mtg Padstyle: EX70Y70D70P" at 83.652,114.654 h1.27 r260; Mechanical 7 "Default Padstyle: RX28Y118D0T" at 87.405,113.992 h1.27 r260
J9: Mechanical 7 "0.236in/5.994mm" at 100,147.553 h0.64; Mechanical 7 "0.228in/5.799mm" at 101.27,147.651 h0.64; Mechanical 7 "0.154in/3.902mm" at 93.015,146.703 h0.64; Mechanical 7 "0.413in/10.49mm" at 82.713,161.79 h0.64; Mechanical 7 "0.335in/8.5mm" at 82.396,159.25 h0.64; Mechanical 7 "0.059in/1.5mm" at 84.646,153.535 h0.64; Mechanical 7 "Alt Padstyle 2: OX90Y60D30P" at 88.905,126.171 h1.27; Mechanical 7 "Alt Padstyle 1: OX60Y90D30P" at 88.905,128.076 h1.27; Mechanical 7 "Right Mtg Padstyle: EX60Y60D30P" at 90.175,129.981 h1.27; Mechanical 7 "Left Mtg Padstyle: EX60Y60D30P" at 89.857,131.886 h1.27; Mechanical 7 "3rd Mtg Padstyle: EX70Y70D70P" at 89.54,133.791 h1.27; Mechanical 7 "2nd Mtg Padstyle: EX70Y70D70P" at 89.54,135.696 h1.27; Mechanical 7 "1st Mtg Padstyle: RX79Y47D0T" at 89.222,137.601 h1.27; Mechanical 7 "Default Padstyle: RX28Y118D0T" at 89.54,139.506 h1.27
J10: Mechanical 7 "0.114in/2.896mm" at 63.359,147.713 h0.64; Mechanical 7 "-0.015in/-0.382mm" at 61.454,149.351 h0.64; Mechanical 7 "-0.099in/-2.525mm" at 69.709,148.28 h0.64; Mechanical 7 "0in/0mm" at 85.568,149.542 h0.64; Mechanical 7 "0.157in/3.988mm" at 78.145,161.557 h0.64; Mechanical 7 "0.142in/3.6mm" at 78.462,159.017 h0.64; Mechanical 7 "0.039in/1mm" at 78.03,153.302 h0.64; Mechanical 7 "Alt Padstyle 2: OX90Y60D30P" at 71.953,129.183 h1.27